# EAGLE board LPC1114_RefDesign_v1.3 (EAGLE 5.07)
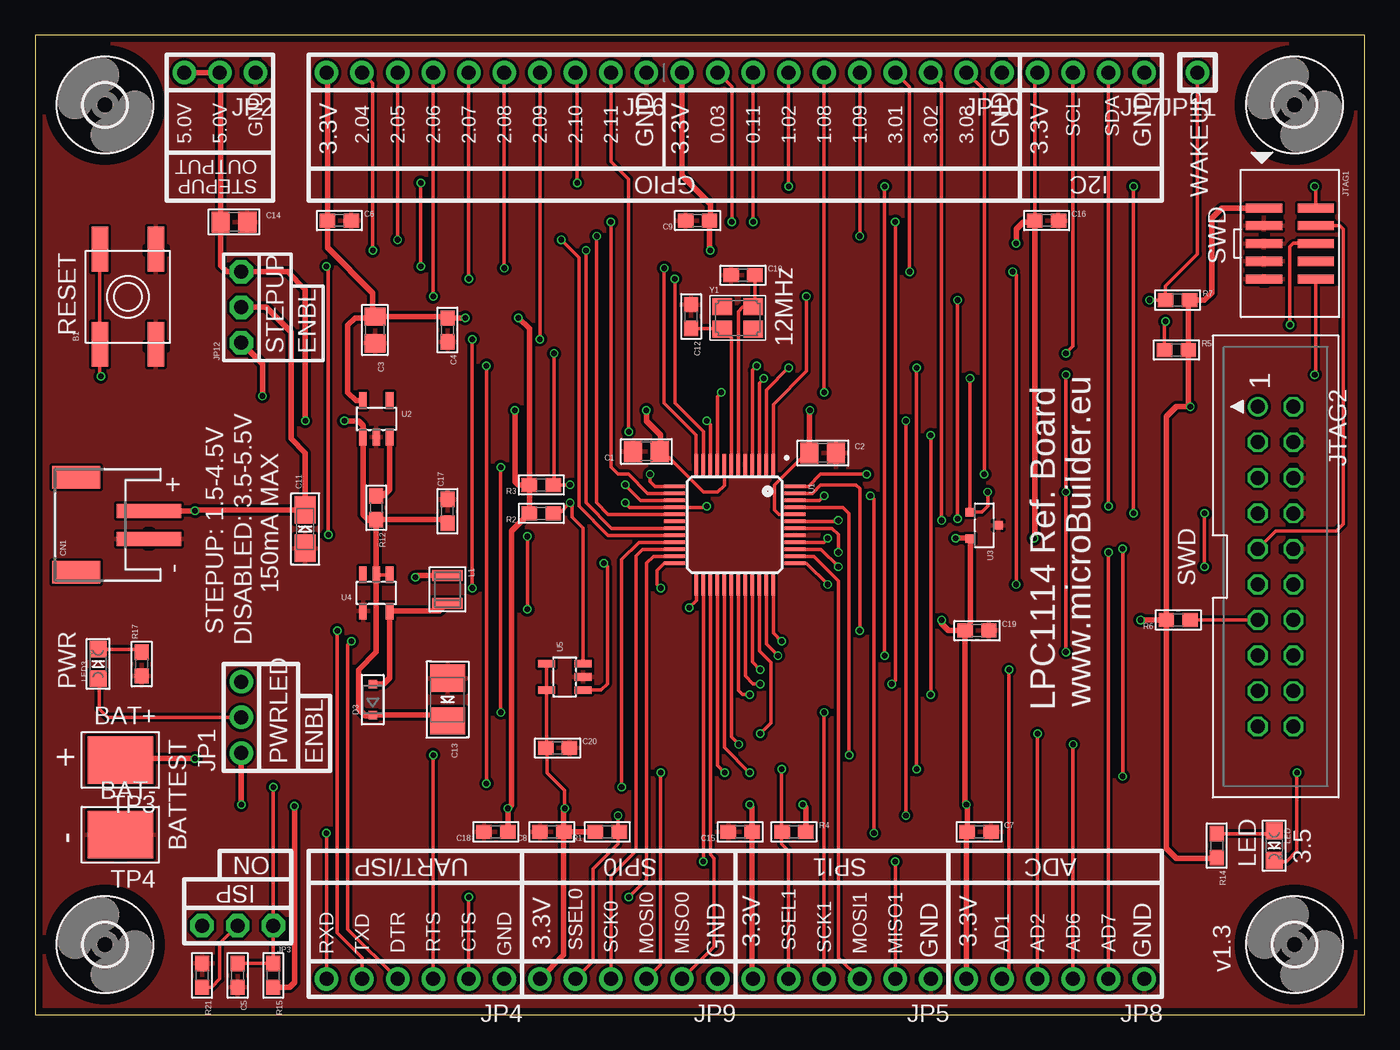
[diagram p0: board, top side]
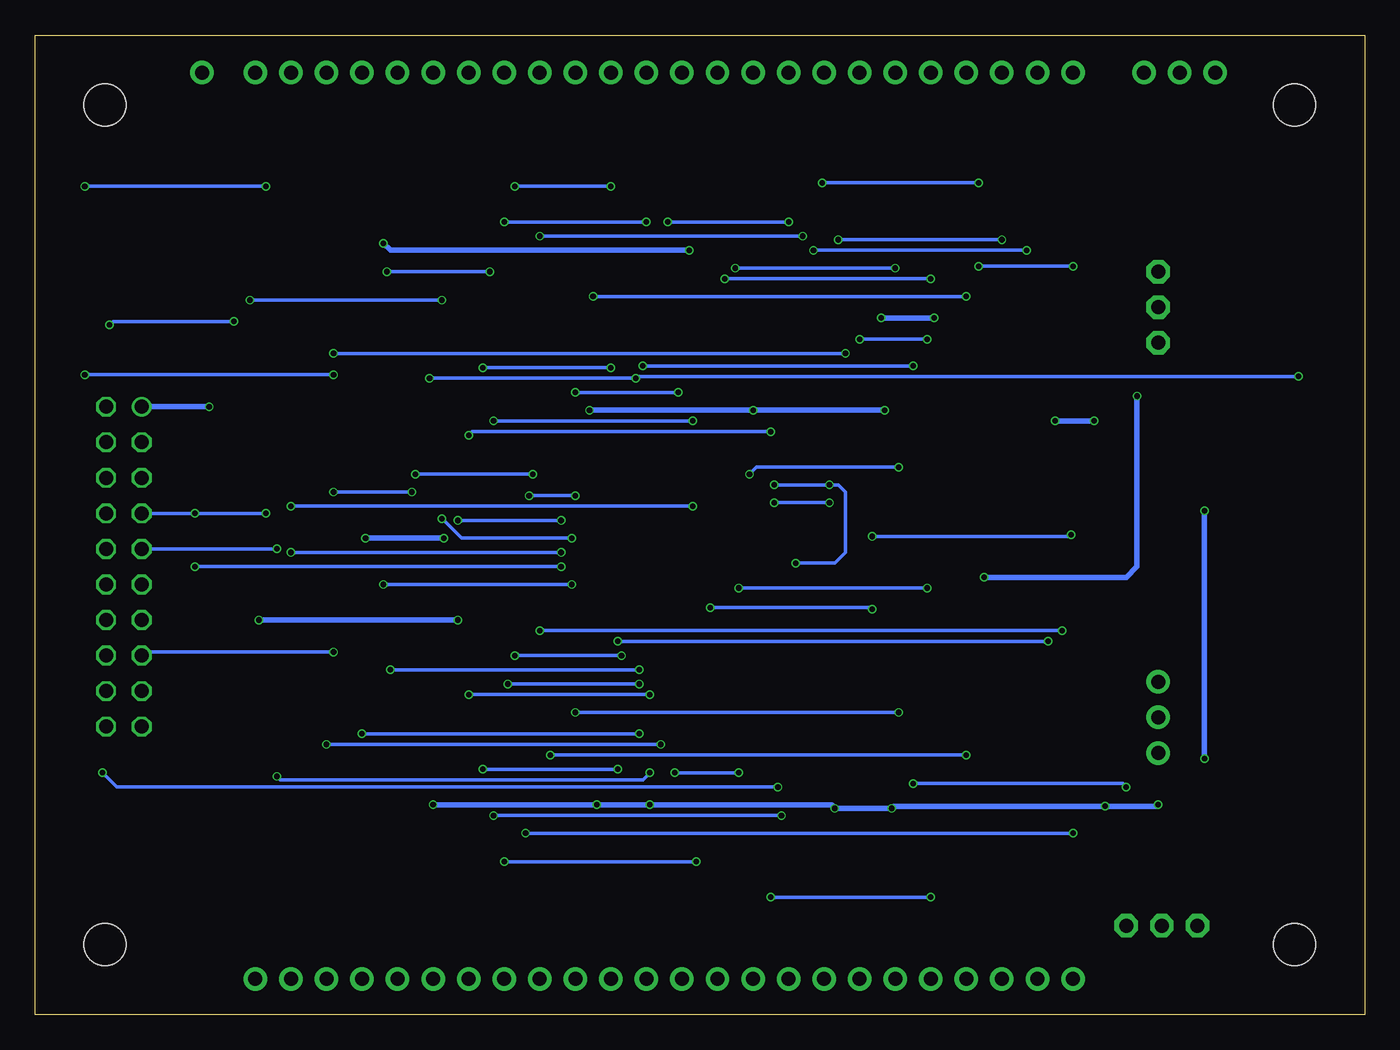
[diagram p1: board, bottom side, seen from below]

Size 95 x 70 mm. Coordinates in mm from the lower left corner, seen from the top.
Outline: 95,0 95,70 0,70 0,0 95,0
Copper layers (1*16): Top 0.035mm / dielectric 1.5mm / Bottom 0.035mm
Design rules "PCBCart-.1mmAnnulars": minimum track width 8mil, minimum drill 0.4mm, track to track 8mil, track to pad 8mil, pad to pad 8mil, via to via 8mil, smd to smd 8mil, copper to edge 20mil, drill to drill 8mil, minimum pad ring 8mil, minimum via ring 4mil, stop-mask expansion 3mil, vias tented up to drill 0mil, thermal gap 8mil
tRestrict: area 9.4,47.5 to 9.4,48; area 7.9,47.5 to 7.9,48; area 9.4,54.4 to 9.4,54.9; area 7.9,54.4 to 7.9,54.9; area 7.9,33.4 to 8.4,33.4; area 7.9,34.6 to 8.4,34.6; area 5.8,11 to 6.4,11; area 5.8,14.6 to 6.4,14.7; area 79,68.2 to 79.5,68.3; area 78.3,67.1 to 78.4,67.6; area 80.1,67.1 to 80.2,67.6; area 68.8,68.2 to 69.3,68.3; 36 more areas

## Footprints (pad centres in the part's own frame; a part is rotated, then mirrored left to right if it is on the bottom)
EVQ-Q2 = smd 3.2 x 1.2: A -3.4,-2; A' 3.4,-2; B -3.4,2; B' 3.4,2
0805 = smd 1.3 x 1.5: 1 -0.95,0; 2 0.95,0
0603 = smd 1.1 x 1: 1 -0.85,0; 2 0.85,0
EIA3216-18/A-R = smd 1.95 x 1.5: + 1.375,0; - -1.375,0
EIA3528-21/B-R = smd 1.95 x 2.5: + 1.525,0; - -1.525,0
JSTPH2 = smd 1 x 4.6: 1 -1,-3.7; 2 1,-3.7 | smd 1.6 x 3.4: NC1 -3.4,1.5; NC2 3.4,1.5
SOD-323 = smd 0.6 x 0.6: A 1.1,0; C -1.1,0
1X03_ROUND = drill 1 pad 1.676 round: 1 -2.54,0; 2 0,0; 3 2.54,0
JUMPER3 = drill 1 pad 1.676 octagon: 1 -2.54,0; 2 0,0; 3 2.54,0
1X06_ROUND = drill 1 pad 1.676 round: 1 -6.35,0; 2 -3.81,0; 3 -1.27,0; 4 1.27,0; 5 3.81,0; 6 6.35,0
1X10_ROUND = drill 1 pad 1.676 round: 1 -11.43,0; 2 -8.89,0; 3 -6.35,0; 4 -3.81,0; 5 -1.27,0; 6 1.27,0; 7 3.81,0; 8 6.35,0; 9 8.89,0; 10 11.43,0
1X04_ROUND = drill 1 pad 1.676 round: 1 -3.81,0; 2 -1.27,0; 3 1.27,0; 4 3.81,0
1X01_ROUND = drill 1 pad 1.676 round: 1 0,0
2X05_1.27MM_SMT = smd 0.65 x 2.6: 1 -2.54,-1.85; 2 -2.54,1.85; 3 -1.27,-1.85; 4 -1.27,1.85; 5 0,-1.85; 6 0,1.85; 7 1.27,-1.85; 8 1.27,1.85; 9 2.54,-1.85; 10 2.54,1.85
JTAG-ARM = drill 1 round: 1 -11.43,-1.27 | drill 1 octagon: 2 -11.43,1.27; 3 -8.89,-1.27; 4 -8.89,1.27; 5 -6.35,-1.27; 6 -6.35,1.27; 7 -3.81,-1.27; 8 -3.81,1.27; 9 -1.27,-1.27; 10 -1.27,1.27; 11 1.27,-1.27; 12 1.27,1.27; 13 3.81,-1.27; 14 3.81,1.27; 15 6.35,-1.27; 16 6.35,1.27; 17 8.89,-1.27; 18 8.89,1.27; 19 11.43,-1.27; 20 11.43,1.27
INDUCTOR_1007 = smd 0.8 x 2.2: P$1 -1,0; P$2 1,0
CHIPLED_0805 = smd 1.2 x 1.2: A 0,-1.05; C 0,1.05
TESTPOINT_SMT = smd 4.7 x 3.4: P$1 0,0
LQFP48 = smd 1.5 x 0.25: 1 -4.3,2.75; 2 -4.3,2.25; 3 -4.3,1.75; 4 -4.3,1.25; 5 -4.3,0.75; 6 -4.3,0.25; 7 -4.3,-0.25; 8 -4.3,-0.75; 9 -4.3,-1.25; 10 -4.3,-1.75; 11 -4.3,-2.25; 12 -4.3,-2.75; 25 4.3,-2.75; 26 4.3,-2.25; 27 4.3,-1.75; 28 4.3,-1.25; 29 4.3,-0.75; 30 4.3,-0.25; 31 4.3,0.25; 32 4.3,0.75; 33 4.3,1.25; 34 4.3,1.75; 35 4.3,2.25; 36 4.3,2.75 | smd 0.25 x 1.5: 13 -2.75,-4.3; 14 -2.25,-4.3; 15 -1.75,-4.3; 16 -1.25,-4.3; 17 -0.75,-4.3; 18 -0.25,-4.3; 19 0.25,-4.3; 20 0.75,-4.3; 21 1.25,-4.3; 22 1.75,-4.3; 23 2.25,-4.3; 24 2.75,-4.3; 37 2.75,4.3; 38 2.25,4.3; 39 1.75,4.3; 40 1.25,4.3; 41 0.75,4.3; 42 0.25,4.3; 43 -0.25,4.3; 44 -0.75,4.3; 45 -1.25,4.3; 46 -1.75,4.3; 47 -2.25,4.3; 48 -2.75,4.3
SOT23-5 = smd 0.55 x 1.2: 1 -0.95,-1.3; 2 0,-1.3; 3 0.95,-1.3; 4 0.95,1.3; 5 -0.95,1.3
SOT23-R = smd 0.6 x 0.7: 1 -0.95,-1; 2 0.95,-1; 3 0,1
MOUNTINGHOLE_3.0 = hole 3: 0,0
CRYSTAL_3.2X2.5 = smd 1.4 x 1.2: 1 -1.1,-0.8; 2 1.1,0.8; GND1 -1.1,0.8; GND2 1.1,-0.8

## Placement (x,y rotation side)
B1  RESET  [EVQ-Q2]  6.64,51.29 90 top
C1  10µF  [0805]  43.69,40.23 180 top
C2  10µF  [0805]  56.29,40.13 0 top
C3  10µF  [0805]  24.29,48.92 270 top
C4  0.1µF  [0603]  29.47,48.92 270 top
C5  0.1µF  [0603]  14.48,2.79 270 top
C6  0.1µF  [0603]  21.75,56.74 0 top
C7  0.1µF  [0603]  67.47,13.06 0 top
C8  0.1µF  [0603]  36.94,13.06 180 top
C9  0.1µF  [0603]  47.35,56.74 180 top
C10  16pF  [0603]  50.59,52.83 0 top
C11  10µF  [EIA3216-18/A-R]  19.31,34.7 90 top
C12  16pF  [0603]  46.88,49.89 270 top
C13  47µF  [EIA3528-21/B-R]  29.47,22.5 270 top
C14  10µF  [0805]  14.23,56.64 0 top
C15  0.1µF  [0603]  50.4,13.06 180 top
C16  0.1µF  [0603]  72.29,56.74 0 top
C17  1.0µF  [0603]  29.47,35.97 90 top
C18  0.1µF  [0603]  32.92,13.06 180 top
C19  0.1µF  [0603]  67.31,27.43 0 top
C20  0.1µF  [0603]  37.34,19.05 0 top
CN1  JSTPH2  [JSTPH2]  4.45,35 90 top
D3  ZLLS410TA  [SOD-323]  24.13,22.5 90 top
JP1  PWRLED  [1X03_ROUND]  14.74,21.23 90 top
JP2  STEPUPOUT  [1X03_ROUND]  13.21,67.31 180 top
JP3  ISPEN  [JUMPER3]  14.48,6.35 180 top
JP4  UART/ISP  [1X06_ROUND]  27.18,2.54 180 top
JP5  SPI1  [1X06_ROUND]  57.66,2.54 180 top
JP6  PIO2  [1X10_ROUND]  32.26,67.31 180 top
JP7  I2C0  [1X04_ROUND]  75.44,67.31 180 top
JP8  ADC  [1X06_ROUND]  72.9,2.54 180 top
JP9  SPI0  [1X06_ROUND]  42.42,2.54 180 top
JP10  PIO  [1X10_ROUND]  57.66,67.31 180 top
JP11  WAKEUP  [1X01_ROUND]  83.06,67.31 180 top
JP12  PWRSEL  [JUMPER3]  14.74,50.55 90 top
JTAG1  SWD_1.27MM  [2X05_1.27MM_SMT]  89.67,55.09 270 top
JTAG2  [JTAG-ARM]  88.65,32 270 top
L1  47µH  [INDUCTOR_1007]  29.47,30.38 270 top
LED  2mA  [CHIPLED_0805]  88.55,12.06 180 top
LED3  3.3VRED  [CHIPLED_0805]  4.51,25.06 0 top
R1  10K  [0603]  40.9,13.06 180 top
R2  10K  [0603]  36.17,35.81 180 top
R3  10K  [0603]  36.17,37.85 180 top
R4  10K  [0603]  54.23,13.06 0 top
R5  10K  [0603]  81.56,47.49 0 top
R6  10K  [0603]  81.69,28.19 180 top
R7  10K  [0603]  81.64,51.05 0 top
R12  10K  [0603]  24.39,36.22 270 top
R14  750  [0603]  84.43,12.06 270 top
R15  NC  [0603]  17.02,2.79 270 top
R17  150  [0603]  7.62,25.04 90 top
R21  0  [0603]  11.94,2.79 270 top
TP3  BAT+  [TESTPOINT_SMT]  6.1,18.19 180 top
TP4  BAT-  [TESTPOINT_SMT]  6.1,12.85 180 top
U1  LPC1114FBD48/301  [LQFP48]  50,35 270 top
U2  ADP121(3.3V)  [SOT23-5]  24.39,42.57 0 top
U3  MCP130T  [SOT23-R]  67.82,34.95 270 top
U4  NCP1402(5.0V)  [SOT23-5]  24.39,30.12 180 top
U5  24AA32AFT-I/OT  [SOT23-5]  37.85,24.13 90 top
U$56  [MOUNTINGHOLE_3.0]  5,5 90 top
U$57  [MOUNTINGHOLE_3.0]  5,65 90 top
U$58  [MOUNTINGHOLE_3.0]  90,65 90 top
U$59  [MOUNTINGHOLE_3.0]  90,5 90 top
Y1  12MHz  [CRYSTAL_3.2X2.5]  50.21,49.78 0 top

## Library data of the parts
B1 C1-C20 CN1 D3 JP1-JP12 JTAG1 JTAG2 L1 LED LED3 R1-R7 R12 R14 R15 R17 R21 TP3 TP4 U1-U5 U$56-U$59 Y1 = microbuilder

## Nets
3.3V: C1.1 C2.1 C3.1 C4.1 C6.1 C7.1 C8.1 C9.1 C15.1 C16.1 C18.1 C19.1 C20.1 JP1.1 JP5.6 JP6.10 JP7.4 JP8.6 JP9.6 JP10.10 JTAG1.1 JTAG2.1 R1.2 R2.2 R3.2 R4.2 R5.2 R6.2 R7.2 R14.2 R15.2 U1.8 U1.44 U2.5 U3.2 U5.4 U5.5
3.3VEN: R12.1 U2.3
AD1: JP8.5 U1.33
AD2: JP8.4 U1.34
AD6: JP8.3 U1.30
AD7: JP8.2 U1.42
CTS: JP4.2 U1.23
DTR: JP4.4 U1.36
GND: B1.A B1.A' C1.2 C2.2 C3.2 C4.2 C5.2 C6.2 C7.2 C8.2 C9.2 C10.1 C11.- C12.1 C13.- C14.2 C15.2 C16.2 C17.2 C18.2 C19.2 C20.2 CN1.1 JP2.1 JP4.1 JP5.1 JP6.1 JP7.1 JP8.1 JP9.1 JP10.1 JTAG1.3 JTAG1.5 JTAG1.7 JTAG1.9 JTAG2.4 JTAG2.6 JTAG2.8 JTAG2.10 R17.1 R21.1 TP4.P$1 U1.5 U1.41 U2.2 U3.3 U4.4 U5.2
ISP: C5.1 JP3.1 R15.1 U1.4
LED: LED.C U1.21
MISO0: JP9.2 U1.27
MISO1: JP5.2 U1.26
MOSI0: JP9.3 U1.28
MOSI1: JP5.3 U1.38
N$1: JP12.1 L1.P$1
N$2: JTAG1.6 R5.1
N$3: JTAG2.13 R6.1
N$7: JP3.2 R21.2
N$8: JP1.2 LED3.A
N$10: LED3.C R17.2
N$11: C11.+ CN1.2 JP12.2 TP3.P$1
N$12: LED.A R14.1
N$13: D3.A L1.P$2 U4.5
PIO0_3: JP10.9 U1.14
PIO0_11: JP10.8 U1.32
PIO1_2: JP10.7 U1.35
PIO1_8: JP10.6 U1.9
PIO1_9: JP10.5 U1.17
PIO2_4: JP6.9 U1.19
PIO2_5: JP6.8 U1.20
PIO2_6: JP6.7 U1.1
PIO2_7: JP6.6 U1.11
PIO2_8: JP6.5 U1.12
PIO2_9: JP6.4 U1.24
PIO2_10: JP6.3 U1.25
PIO2_11: JP6.2 U1.31
PIO3_1: JP10.4 U1.37
PIO3_2: JP10.3 U1.43
PIO3_3: JP10.2 U1.48
RESET: B1.B B1.B' JTAG1.10 JTAG2.15 U1.3 U3.1
RTS: JP4.3 U1.45
RXD: JP4.6 U1.46
SCK0: JP9.4 U1.22
SCK1: JP5.4 U1.13
SCL: JP7.3 R3.1 U1.15 U5.1
SDA: JP7.2 R2.1 U1.16 U5.3
SSEL0: JP9.5 R1.1 U1.10
SSEL1: JP5.5 R4.1 U1.2
SWCLK: JTAG1.4 JTAG2.9 U1.29
SWDIO: JTAG1.2 JTAG2.7 U1.39
TXD: JP4.5 U1.47
VCC: C13.+ C14.1 C17.1 D3.C JP2.2 JP2.3 JP12.3 R12.2 U2.1 U4.1 U4.2
WAKEUP: JP11.1 R7.1 U1.40
XTALIN: C10.2 U1.6 Y1.2
XTALOUT: C12.2 U1.7 Y1.1

## Tracks (layer width: path | path; a pad name or v marks a point on that pad's centre or on a via)
3.3V  (via drill 0.4)
  Top 0.254: R14.2 84.39,11.18 | 82.41,50.98 R7.2 | C16.1 71.44,67.12 JP7.4 | v82.55,43.43 82.41,43.57 | U1.44 53.15,35.75 52.84,36.07 52.84,37.85 54.87,39.88 55.09,39.88 C2.1 | U1.8 49.25,37.82 48.77,37.34 47.76,37.34 45.22,39.88 45,39.88 C1.1 | U5.4 U5.5 36.55,19.11 C20.1 36.58,18.96 36.58,17.27 37.85,16 v37.85,14.73
  Top 0.406: U2.5 22.94,43.87 22.36,44.45 22.36,49.28 22.86,49.78 24.2,49.78 C3.1 | C3.1 24.13,50.02 24.13,51.56 20.9,54.8 C6.1 20.9,67.25 JP6.10 | C3.1 29.37,49.87 C4.1 29.48,49.78 v30.74,49.78 | R15.2 18.2,1.94 18.55,2.29 v18.55,14.88 | v14.74,14.99 JP1.1 | R6.2 80.84,11.87 81.54,11.18 84.39,11.18 | 82.41,50.98 R5.2 82.41,43.57 | JTAG1.1 84.81,57.63 84.08,56.9 84.08,51.56 83.57,51.05 R7.2 | R6.2 80.84,42.74 81.54,43.43 v82.55,43.43 | R3.2 35.32,49.01 v34.55,49.78 | JP10.10 46.23,59.94 48.26,57.91 48.26,56.81 C9.1 48.2,54.67 v48.26,54.61 | C18.1 33.79,13.07 v33.79,14.73 34.04,14.99 34.04,34.54 R2.2 R3.2 | C8.1 37.79,14.67 v37.85,14.73 | C8.1 R1.2 | C8.1 37.79,4.25 JP9.6 | v51.06,14.99 51.25,14.8 C15.1 51.25,2.6 JP5.6 | R4.2 55.08,14.77 v54.87,14.99 | JP8.6 66.55,12.95 66.62,13.02 C7.1 66.62,14.92 v66.55,14.99 66.46,15.07 C19.1 | C19.1 66.82,27.79 U3.2 66.79,34.04 v65.79,34.04 | v71.38,34.04 71.44,34.1 C16.1 71.34,56.64 70.62,56.64 70.11,56.13 v70.11,55.12 | R6.2 v79,28.19 | v64.77,28.19 64.77,27.94 65.28,27.43 C19.1 | R3.2 34.55,37.85 34.29,38.1 v34.29,43.18 | C2.1 55.34,43.14 v55.38,43.18 | v43.69,43.18 43.69,42.42 44.71,41.4 44.71,40.3 C1.1
  Bottom 0.254: 14.84,14.88 v14.74,14.99
  Bottom 0.406: 14.84,14.88 v18.55,14.88 33.63,14.88 v33.79,14.73 v37.85,14.73 38.1,14.99 v51.06,14.99 v54.87,14.99 v66.55,14.99 | v82.55,43.43 JTAG2.1 | v65.79,34.04 v71.38,34.04 | v79,28.19 v64.77,28.19 | v48.26,54.61 69.6,54.61 v70.11,55.12 | v34.55,49.78 v30.74,49.78 | v34.29,43.18 v43.69,43.18 v55.38,43.18
3.3VEN
  Top 0.406: U2.3 25.34,37.53 24.9,37.08 24.4,37.08 R12.1
AD1  (via drill 0.4)
  Top 0.254: U1.33 51.25,25.21 v51.82,24.64 | v69.6,24.64 69.6,3.05 JP8.5
  Bottom 0.254: v69.6,24.64 v51.82,24.64
AD2  (via drill 0.4)
  Top 0.254: JP8.4 v71.63,20.07 | U1.34 51.75,25.98 52.58,25.15 52.58,20.83 v51.82,20.07
  Bottom 0.254: v71.63,20.07 v51.82,20.07
AD6  (via drill 0.4)
  Top 0.254: U1.30 49.75,19.85 v50.3,19.3 | JP8.3 v74.17,19.3
  Bottom 0.254: v74.17,19.3 v50.3,19.3
AD7  (via drill 0.4)
  Top 0.254: U1.42 56.95,34.75 57.41,34.29 v57.41,33.02 | JP8.2 v76.71,33.02
  Bottom 0.254: v76.71,33.02 v57.41,33.02
CTS  (via drill 0.4)
  Top 0.254: U1.23 44.18,32.75 43.69,32.26 43.69,9.65 v42.42,8.38 | v30.99,8.38 JP4.2
  Bottom 0.254: v42.42,8.38 v30.99,8.38
DTR  (via drill 0.4)
  Top 0.254: U1.36 52.75,27.26 v53.34,26.67 | v22.61,26.67 22.36,26.42 22.36,6.1 JP4.4
  Bottom 0.254: v53.34,26.67 v22.61,26.67
GND
  pour Top (isolate 0.203): 0,0 0,70 95,70 95,0
ISP  (via drill 0.4)
  Top 0.254: C5.1 R15.1 JP3.1 v17.02,16.26 | U1.4 51.25,46.04 v51.57,46.35 | v32.26,16.51 v32.26,46.35
  Bottom 0.254: v32.26,46.35 v51.57,46.35 | v32.26,16.51 17.28,16.51 v17.02,16.26
LED  (via drill 0.4)
  Top 0.254: U1.21 43.15,33.75 41.91,32.51 v41.91,16.26 | v90.17,17.27 90.17,11.68 89.41,10.92 88.64,10.92 LED.C
  Bottom 0.254: v41.91,16.26 89.16,16.26 v90.17,17.27
MISO0
  Top 0.254: U1.27 48.25,11.44 48.52,11.18 48.52,4.83 JP9.2
MISO1  (via drill 0.4)
  Top 0.254: U1.26 v47.75,10.93 v47.76,10.92 | JP5.2 v61.47,10.92
  Bottom 0.254: v61.47,10.92 v47.76,10.92
MOSI0  (via drill 0.4)
  Top 0.254: U1.28 48.75,17.8 v49.28,17.27 | v44.71,17.27 44.71,3.56 JP9.3
  Bottom 0.254: v44.71,17.27 v49.28,17.27
MOSI1
  Top 0.254: U1.38 55.65,32.75 57.41,30.99 57.41,4.06 JP5.3
N$1  (via drill 0.4)
  Top 0.406: L1.P$1 27.32,31.38 v27.18,31.24 | JP12.1 16.26,46.48 v16.26,44.2
  Bottom 0.406: v27.18,31.24 17.02,31.24 16.26,32 v16.26,44.2
N$2  (via drill 0.4)
  Top 0.254: R5.1 80.71,49.47 v80.78,49.53 | v89.67,49.28 89.67,54.86 89.92,55.12 91.49,55.12 JTAG1.6
  Bottom 0.254: v80.78,49.53 89.41,49.53 v89.67,49.28
N$3
  Top 0.254: JTAG2.13 R6.1
N$7
  Top 0.254: R21.2 12.62,1.94 13.21,2.54 13.21,5.08 JP3.2
N$8
  Top 0.254: JP1.2 5.19,21.23 4.58,21.84 4.58,23.94 LED3.A
N$10
  Top 0.254: LED3.C 7.41,26.11 R17.2
N$11  (via drill 0.4)
  Top 0.406: CN1.2 v11.43,36 11.51,36.07 C11.+ 19.31,40.13 18.29,41.15 18.29,48.77 16.51,50.55 JP12.2 | TP3.P$1 6.1,18.29 v11.43,18.29
  Bottom 0.406: v11.43,18.29 v11.43,36
N$12
  Top 0.254: R14.1 88.35,12.91 LED.A
N$13
  Top 0.406: D3.A 24.15,23.62 24.9,23.62 25.34,24.06 U4.5 28.91,28.82 L1.P$2
PIO0_3  (via drill 0.4)
  Top 0.254: U1.14 43.78,37.25 42.42,38.61 41.66,38.61 41.15,39.12 v41.15,56.64 | v49.79,56.64 49.79,66.29 JP10.9
  Bottom 0.254: v41.15,56.64 v49.79,56.64
PIO0_11  (via drill 0.4)
  Top 0.254: v51.31,56.64 JP10.8 | v61.47,56.64 61.47,23.88 v61.22,23.62 | 51.57,23.62 v51.82,23.62 51.31,23.62 50.75,24.18 U1.32
  Bottom 0.254: v61.47,56.64 v51.31,56.64 | v61.22,23.62 v51.82,23.62
PIO1_2  (via drill 0.4)
  Top 0.254: U1.35 52.25,26.49 v53.09,25.65 | v60.71,25.65 v60.71,59.18 | v53.85,59.18 JP10.7
  Bottom 0.254: v60.71,25.65 v53.09,25.65 | v60.71,59.18 v53.85,59.18
PIO1_8  (via drill 0.4)
  Top 0.254: U1.9 48.75,44.17 v49.03,44.45 | v56.39,44.45 JP10.6
  Bottom 0.254: v56.39,44.45 v49.03,44.45
PIO1_9  (via drill 0.4)
  Top 0.254: v40.14,55.63 40.14,36.58 40.96,35.75 U1.17 | v58.93,55.63 JP10.5
  Bottom 0.254: v40.14,55.63 v58.93,55.63
PIO2_4  (via drill 0.4)
  Top 0.254: U1.19 41.2,34.75 39.37,36.58 v39.37,54.61 | v24.13,54.61 24.13,66.55 JP6.9
  Bottom 0.254: v39.37,54.61 v24.13,54.61
PIO2_5  (via drill 0.4)
  Top 0.254: U1.20 40.94,34.25 38.87,36.32 38.87,54.1 v37.6,55.37 | v25.91,55.37 JP6.8
  Bottom 0.254: v37.6,55.37 v25.91,55.37
PIO2_6  (via drill 0.4)
  Top 0.254: v28.45,51.31 JP6.7 | v55.12,51.31 55.12,45.97 52.75,43.6 U1.1
  Bottom 0.254: v55.12,51.31 v28.45,51.31
PIO2_7  (via drill 0.4)
  Top 0.254: U1.11 47.75,41.66 45.72,43.69 v45.72,52.58 | v30.99,52.58 JP6.6
  Bottom 0.254: v45.72,52.58 v30.99,52.58
PIO2_8  (via drill 0.4)
  Top 0.254: U1.12 47.25,39.37 47.25,41.4 44.96,43.69 v44.96,53.34 | v33.53,53.34 JP6.5
  Bottom 0.254: v44.96,53.34 v33.53,53.34
PIO2_9  (via drill 0.4)
  Top 0.254: U1.24 44.95,32.25 44.45,31.75 44.45,30.73 v44.71,30.48 | v31.25,30.48 v31.25,48.26 | v36.07,48.26 JP6.4
  Bottom 0.254: v44.71,30.48 v31.25,30.48 | v31.25,48.26 v36.07,48.26
PIO2_10  (via drill 0.4)
  Top 0.254: U1.25 47.25,29.59 v46.74,29.08 | v35.18,28.96 v35.18,34.16 | v20.96,34.29 20.96,53.34 v20.83,53.47 | v27.56,53.47 v27.56,59.44 | v38.74,59.44 38.74,67.18 JP6.3
  Bottom 0.254: v46.74,29.08 35.31,29.08 v35.18,28.96 | v35.18,34.16 21.09,34.16 v20.96,34.29 | v20.83,53.47 v27.56,53.47 | v27.56,59.44 v38.74,59.44
PIO2_11  (via drill 0.4)
  Top 0.254: JP6.2 41.15,60.96 42.42,59.69 v42.42,41.66 | v64.01,22.86 v64.01,41.4 | 50.8,22.86 v51.06,22.86 50.55,22.86 50.25,23.16 U1.31
  Bottom 0.254: v42.42,41.66 63.76,41.66 v64.01,41.4 | v64.01,22.86 v51.06,22.86
PIO3_1  (via drill 0.4)
  Top 0.254: U1.37 55.13,32.25 v56.65,30.73 | v70.11,30.73 70.11,52.83 v69.85,53.09 | v62.49,53.09 62.49,66.29 JP10.4
  Bottom 0.254: v70.11,30.73 v56.65,30.73 | v69.85,53.09 v62.49,53.09
PIO3_2  (via drill 0.4)
  Top 0.254: U1.43 57.35,35.25 v57.41,35.31 | v64.77,35.31 64.77,66.55 JP10.3
  Bottom 0.254: v64.77,35.31 v57.41,35.31
PIO3_3  (via drill 0.4)
  Top 0.254: U1.48 55.28,37.75 56.14,38.61 v59.44,38.61 | v67.82,38.61 67.82,66.04 JP10.2
  Bottom 0.254: v67.82,38.61 v59.44,38.61
RESET  (via drill 0.4)
  Top 0.254: B1.B' B1.B 4.64,45.65 v4.7,45.59 | U1.3 51.75,45.14 v52.07,45.47 | v66.81,45.47 66.81,35.92 U3.1 67.65,35.9 68.08,36.32 v68.08,37.34 | v73.66,25.91 v73.66,37.34 v73.66,45.72 | JTAG1.10 91.52,45.79 v91.44,45.72
  Bottom 0.254: v66.81,45.47 v52.07,45.47 51.95,45.59 v4.7,45.59 | v73.66,37.34 v68.08,37.34 | v73.66,25.91 87.13,25.91 JTAG2.15 | v73.66,45.72 v91.44,45.72
RTS  (via drill 0.4)
  Top 0.254: v28.45,18.54 JP4.3 | v58.17,18.54 58.17,35.81 57.73,36.25 U1.45
  Bottom 0.254: v58.17,18.54 v28.45,18.54
RXD  (via drill 0.4)
  Top 0.254: v20.83,12.95 JP4.6 | U1.46 56.06,36.75 v56.39,37.08 | v59.69,37.08 59.95,36.83 v59.95,12.95
  Bottom 0.254: v59.95,12.95 v20.83,12.95 | v59.69,37.08 v56.39,37.08
SCK0
  Top 0.254: JP9.4 41.15,9.91 42.93,11.68 42.93,32.77 43.41,33.25 U1.22
SCK1  (via drill 0.4)
  Top 0.254: JP5.4 v56.39,21.59 | v33.28,21.59 v33.28,39.12 | 43.95,38.35 v43.95,38.61 43.95,38.1 44.3,37.75 U1.13
  Bottom 0.254: v56.39,21.59 v33.28,21.59 | v33.28,39.12 43.44,39.12 v43.95,38.61
SCL  (via drill 0.4)
  Top 0.254: JP7.3 74.17,47.75 v73.66,47.24 | v37.09,47.24 37.09,37.91 R3.1 v38.23,37.85 | U1.15 43.26,36.75 v42.17,37.85 | U5.1 40.46,23.18 40.9,23.62 40.9,32 v40.64,32.26
  Bottom 0.254: v73.66,47.24 v37.09,47.24 | v42.17,37.85 v38.23,37.85 37.6,37.85 37.09,37.34 37.09,33.02 37.85,32.26 v40.64,32.26
SDA  (via drill 0.4)
  Top 0.254: v42.17,36.58 42.49,36.25 U1.16 47.94,36.25 v48.01,36.32 | R2.1 37.47,35.81 v38.23,36.58 38.36,36.45 38.36,35.56 39.15,34.77 U5.3 | v76.71,36.32 JP7.2
  Bottom 0.254: v42.17,36.58 v38.23,36.58 | v76.71,36.32 v48.01,36.32
SSEL0  (via drill 0.4)
  Top 0.254: U1.10 48.25,42.18 v48.01,42.42 | v62.23,14.22 v62.23,42.42 | v41.66,14.22 41.66,13.14 R1.1 41.66,12.97 41.66,12.19 39.88,10.41 39.88,3.81 JP9.5
  Bottom 0.254: v62.23,42.42 v48.01,42.42 | v62.23,14.22 v41.66,14.22
SSEL1  (via drill 0.4)
  Top 0.254: U1.2 52.25,44.63 v53.85,46.23 | v63,17.53 v63,46.23 | v53.34,17.53 53.34,13.1 R4.1 53.34,13.02 53.34,12.19 53.85,11.68 JP5.5
  Bottom 0.254: v63,46.23 v53.85,46.23 | v53.34,17.53 v63,17.53
SWCLK  (via drill 0.4)
  Top 0.254: U1.29 49.25,19.08 v51.06,17.27 | v77.73,17.02 v77.73,33.27 | JTAG1.4 93.25,56.36 93.48,56.13 93.48,35.05 92.97,34.54 88.65,34.54 JTAG2.9
  Bottom 0.254: v51.06,17.27 51.57,16.76 77.47,16.76 v77.73,17.02 | v77.73,33.27 JTAG2.9
SWDIO  (via drill 0.4)
  Top 0.254: U1.39 56.16,33.25 v57.41,32 | v83.57,32 v83.57,35.81 | JTAG1.2 91.52,59.11 v91.44,59.18 | v78.49,35.81 v78.49,59.18
  Bottom 0.254: v83.57,32 v57.41,32 | JTAG2.7 v83.57,35.81 v78.49,35.81 | v78.49,59.18 v91.44,59.18
TXD  (via drill 0.4)
  Top 0.254: JP4.5 23.37,4.06 21.59,5.84 v21.59,27.43 | v58.93,27.43 58.93,37.59 58.68,37.85 56.14,37.85 55.54,37.25 U1.47
  Bottom 0.254: v58.93,27.43 v21.59,27.43
VCC  (via drill 0.4)
  Top 0.254: U4.2 U4.1
  Top 0.406: C13.+ 29.04,21.4 D3.C 24.07,21.34 23.63,21.34 23.12,21.84 23.12,24.64 24.39,25.91 U4.2 R12.2 | v22.1,42.42 23.12,42.42 23.44,42.1 U2.1 23.44,35.75 23.88,35.31 24.32,35.31 R12.2 | v19.31,42.42 19.31,51.82 18.04,53.09 JP12.3 13.72,53.09 13.28,53.53 C14.1 13.28,67.24 JP2.2 JP2.3 | R12.2 29.21,35.37 C17.1
  Bottom 0.406: v22.1,42.42 v19.31,42.42
WAKEUP  (via drill 0.4)
  Top 0.254: JP11.1 83.06,54.36 80.78,52.07 80.78,51.07 R7.1 v79.63,51.05 | U1.40 56.36,33.75 v56.65,34.04 | v65.92,35.43 v65.92,51.05
  Bottom 0.254: v56.65,34.04 64.52,34.04 v65.92,35.43 | v65.92,51.05 v79.63,51.05
XTALIN
  Top 0.254: U1.6 50.25,50.25 50.55,50.55 51.27,50.55 Y1.2 51.44,50.72 C10.2
XTALOUT
  Top 0.254: C12.2 49.06,49.04 Y1.1 49.75,48.34 U1.7

## Text on the board
tPlace: GND | SCL | SDA | 5.0V | 5.0V | 2.04 | 2.05 | 2.06 | 2.07 | 2.08 | 2.09 | 2.10 | 2.11 | GND | 0.03 | 0.11 | 1.02 | 1.08 | 1.09 | 3.01 | 3.02 | 3.03 | GND | GND | OUTPUT | 3.3V | 3.3V | 3.3V | STEPUP | GPIO | I2C | WAKEUP | SWD | RESET | 12MHz | STEPUP | ENBL | SWD | 150mA MAX | STEPUP: 1.5-4.5V | DISABLED: 3.5-5.5V | PWR | LPC1114 Ref. Board | www.microBuilder.eu | + | PWRLED | ENBL | - | BATTEST | ON | UART/ISP | SPI0 | SPI1 | ADC | LED | 3.5 | ISP | SSEL0 | MOSI0 | MISO0 | 3.3V | SSEL1 | MOSI1 | MISO1 | 3.3V | 3.3V | SCK0 | GND | SCK1 | GND | GND | RXD | TXD | DTR | RTS | CTS | GND | AD1 | AD2 | AD6 | AD7 | v1.3